# Altium PCB Vref.PcbDoc
Units mm, origin at the board's own origin, x right, y up, seen from the top; angles counter-clockwise.
Board outline 80.34 x 40.24 mm, 4 copper layers (Top Layer, Int2 (Sign), Int3 (Sign), Bottom Layer), stack 1.481 mm thick; 26 components, 19 nets, 106 pads, 8 vias.
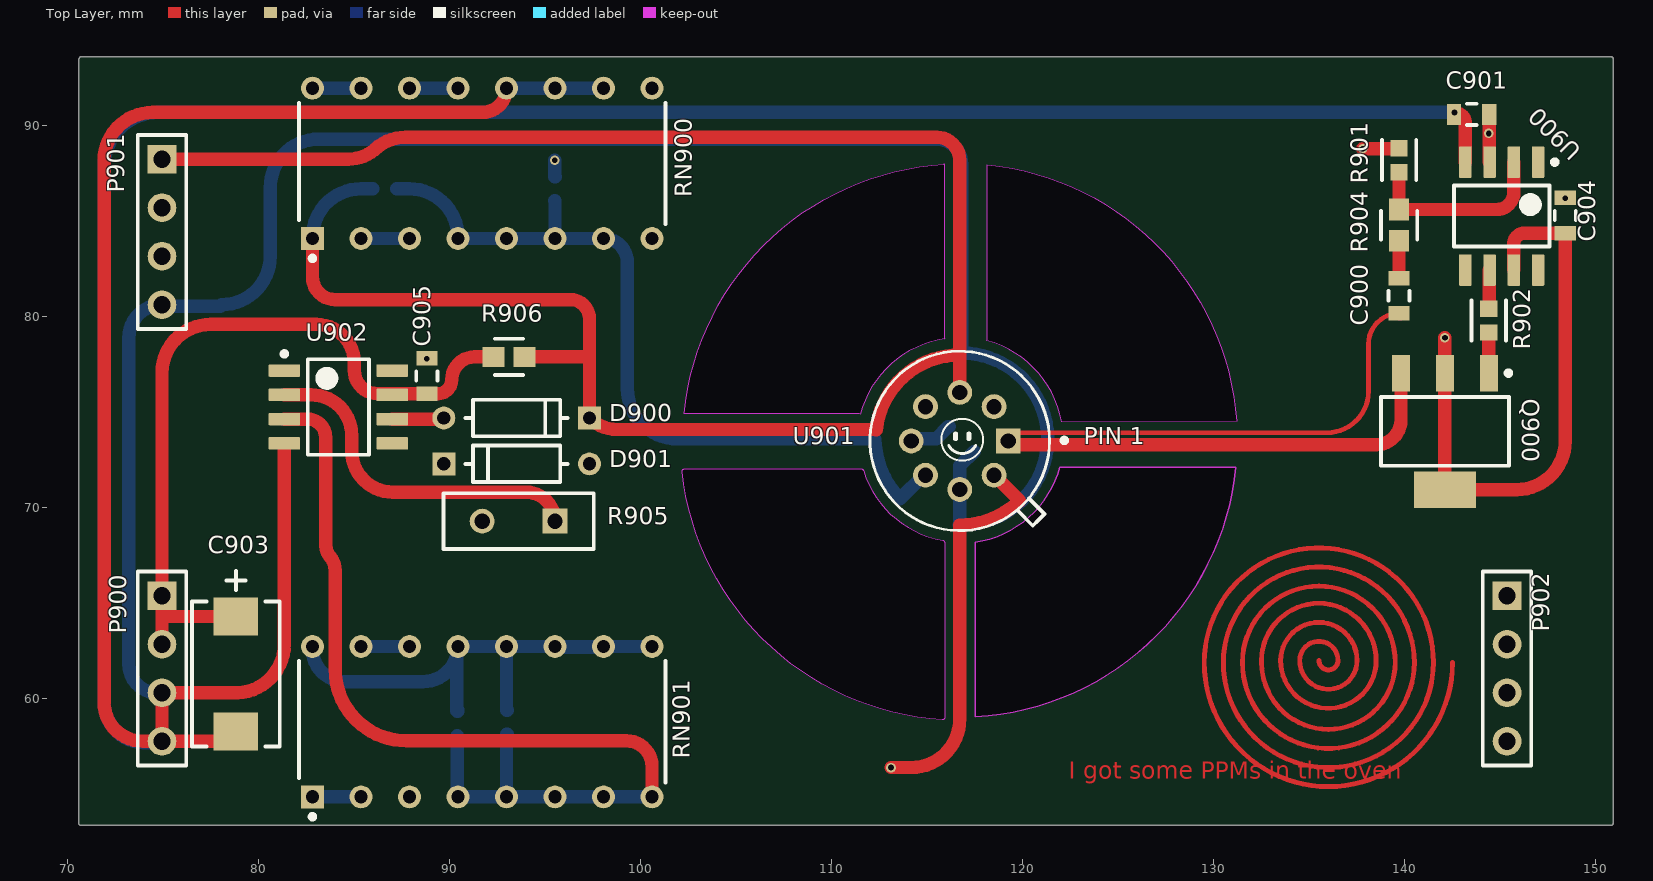
[diagram p0: Top Layer view]
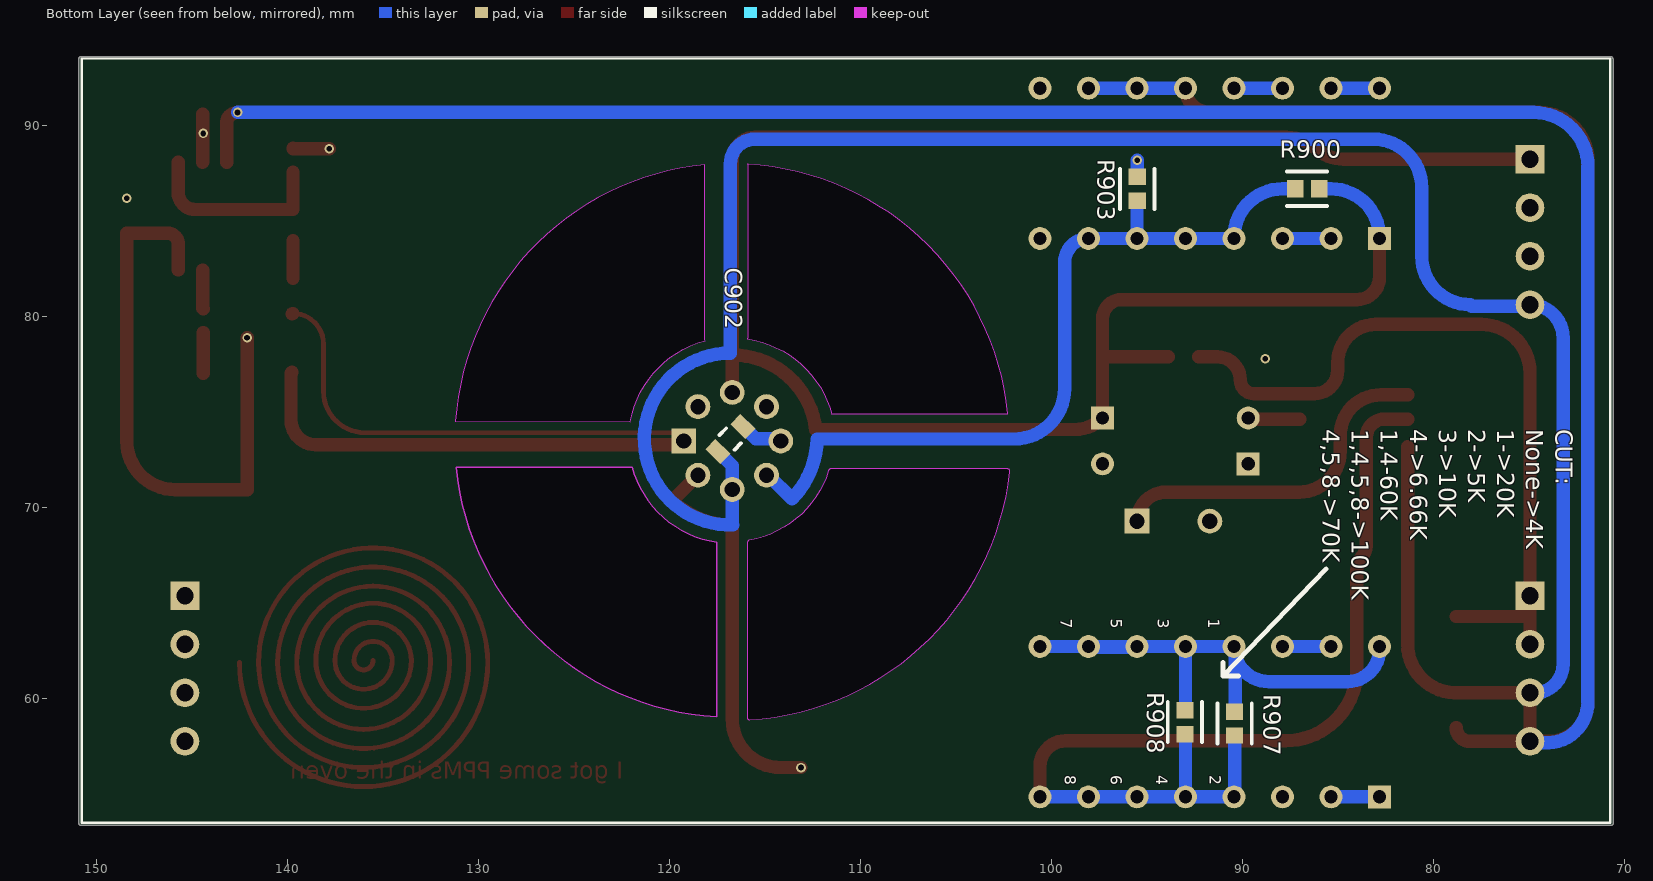
[diagram p1: Bottom Layer view, seen from below]
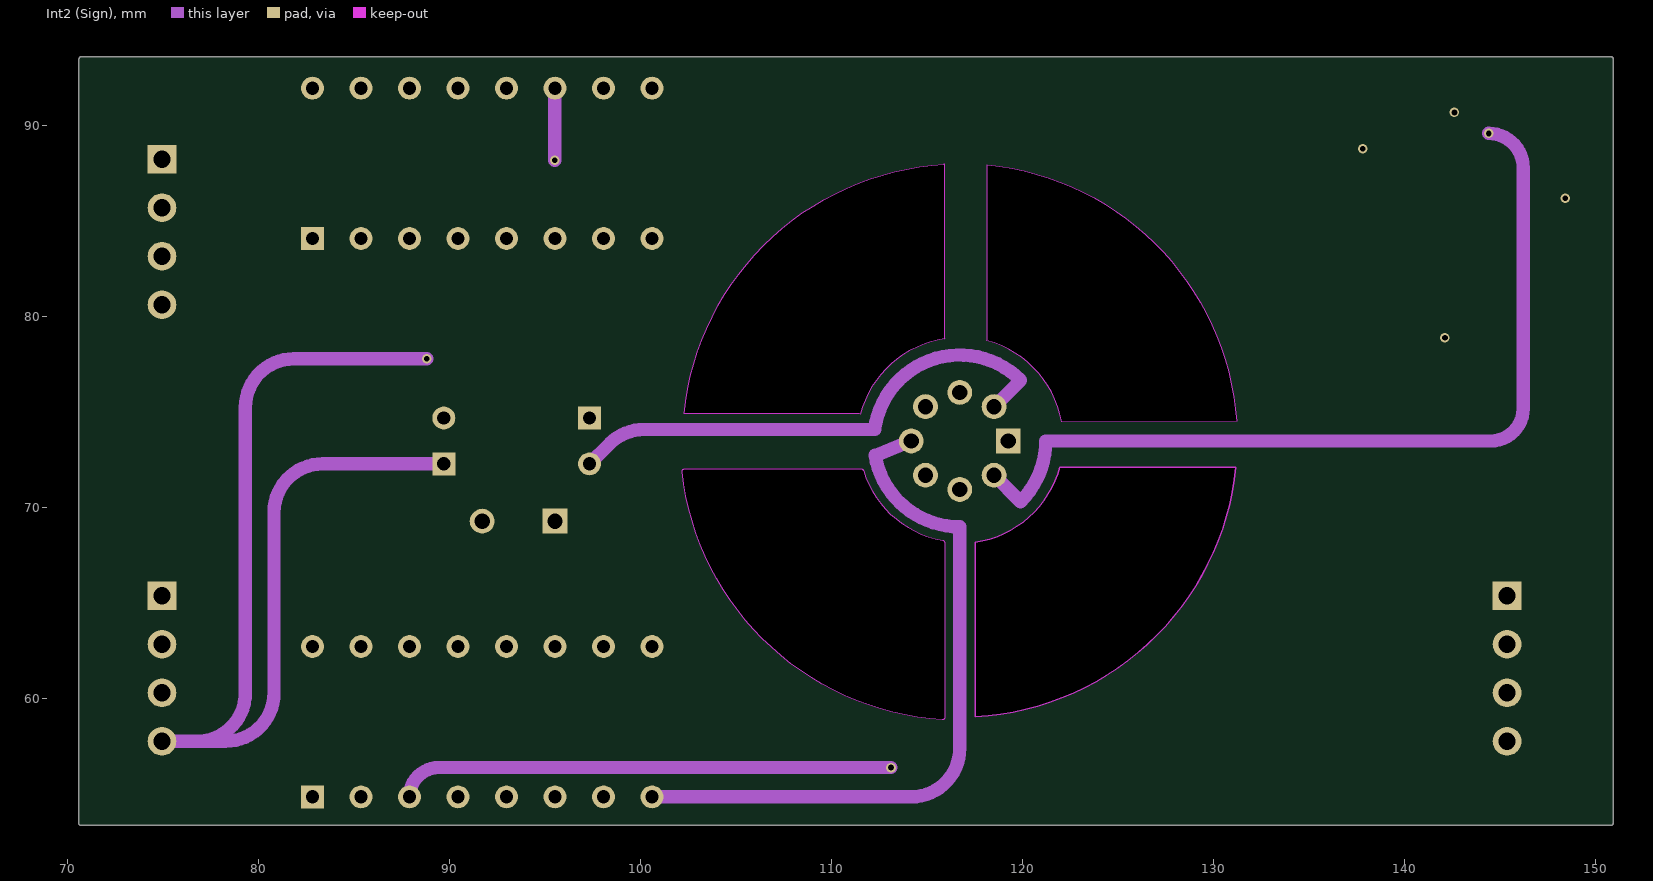
[diagram p2: Int2 (Sign)]
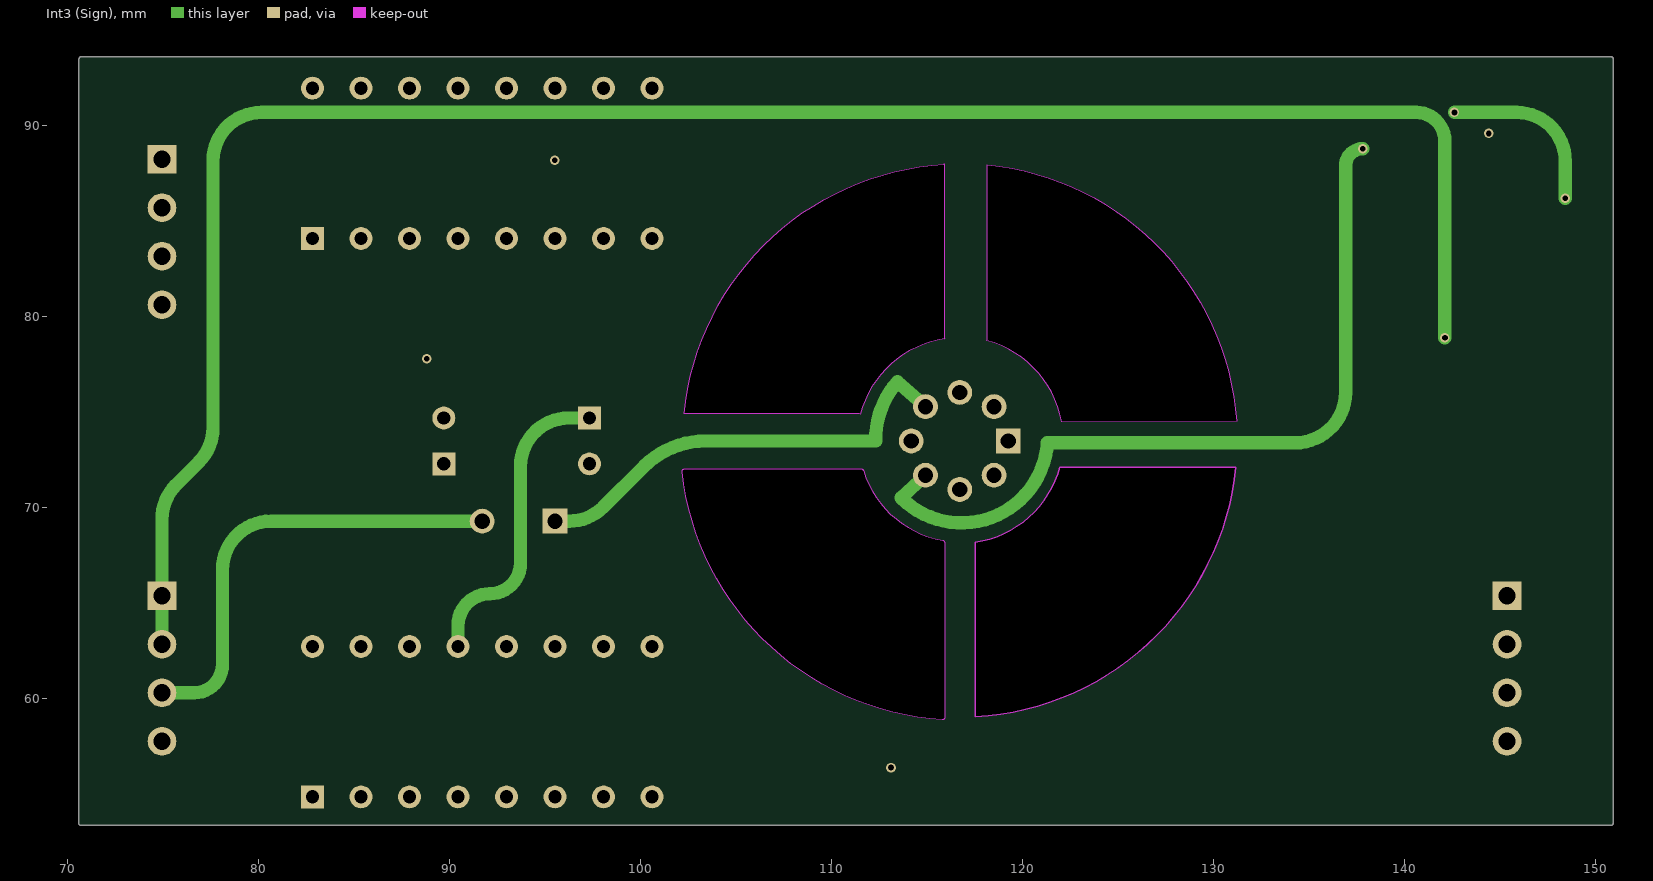
[diagram p3: Int3 (Sign)]
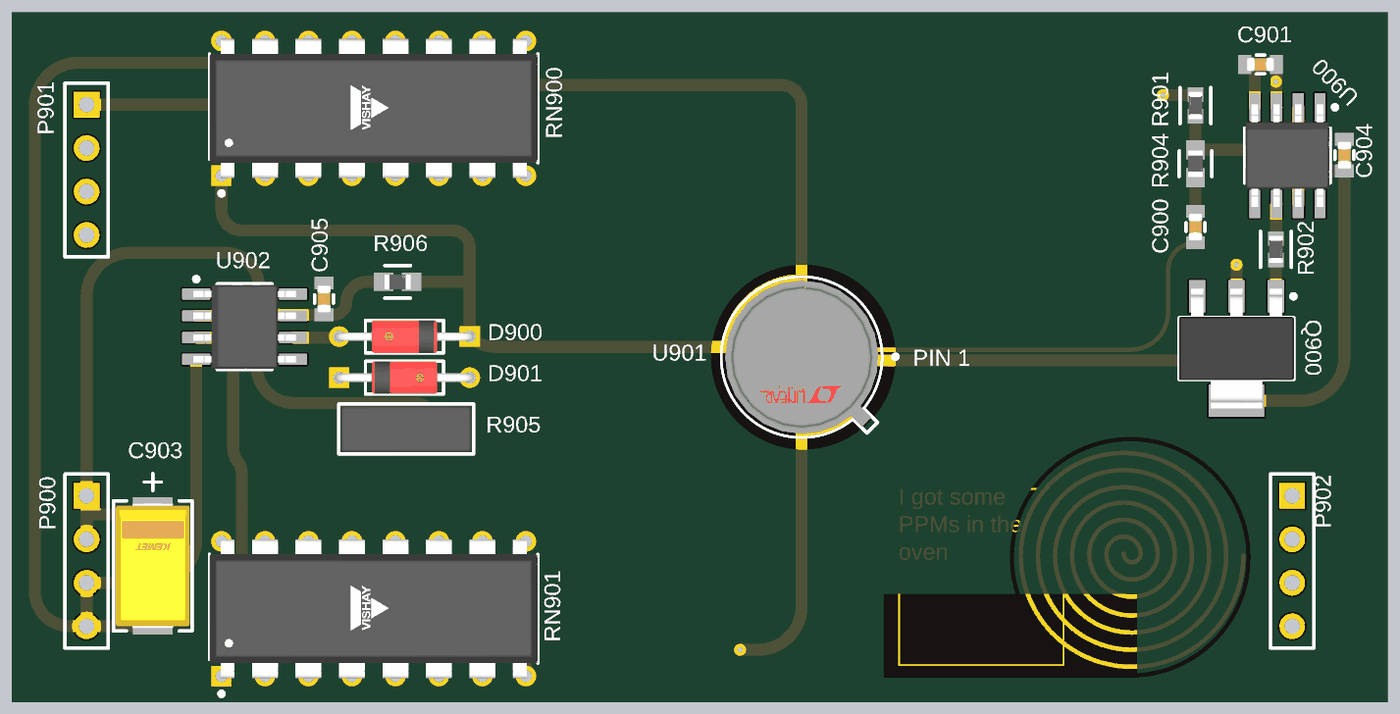
[diagram p4: 3D render of the assembled board from above, using the file's embedded part models]
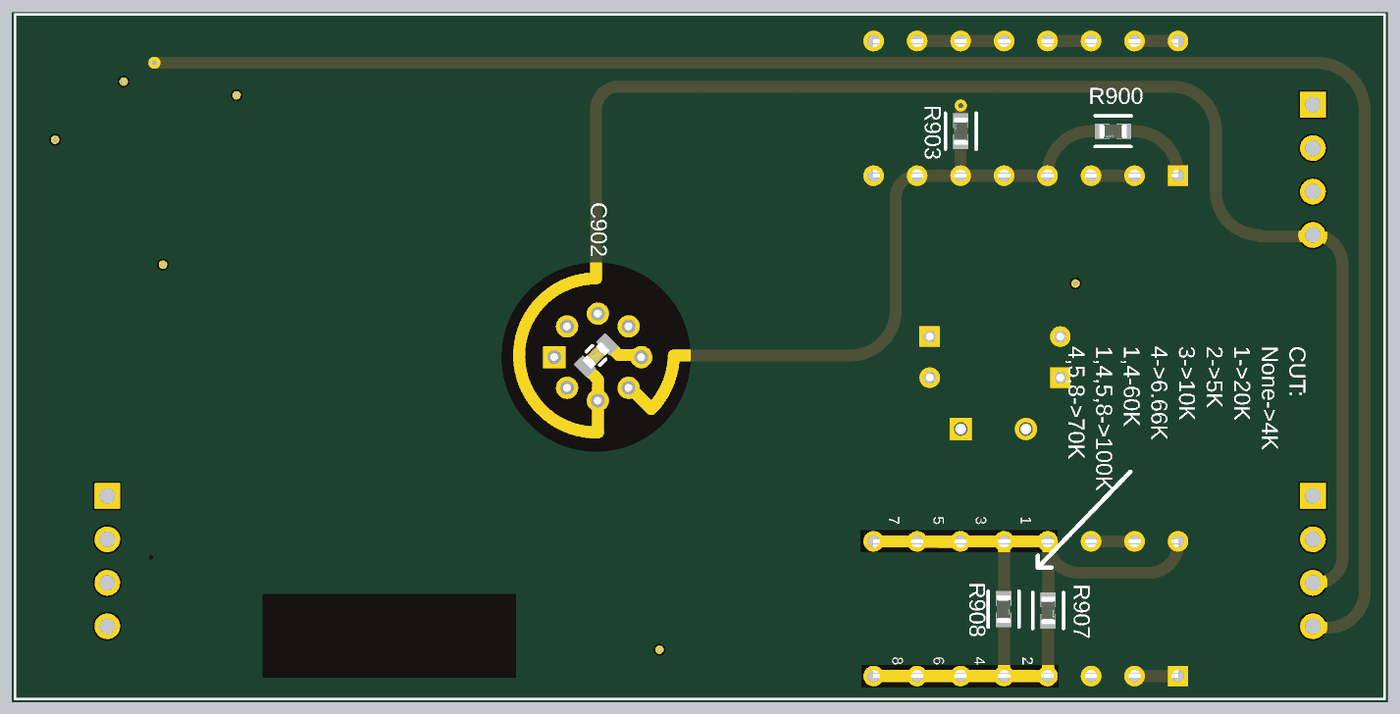
[diagram p5: 3D render of the assembled board from below, using the file's embedded part models]

## Layer stack, top to bottom
Top Solder: solder mask 0.0254, SM-001, Dk 4
Top Layer: signal copper 0.035
Dielectric 1: prepreg 0.0711, PP-006, Dk 4.1
Dielectric 2: prepreg 0.0711, PP-006, Dk 4.1
Dielectric 3: core 0.4572, Core-035, Dk 4.7
Int2 (Sign): signal copper 0.035
Dielectric 4: prepreg 0.0711, PP-006, Dk 4.1
Dielectric 5: prepreg 0.0711, PP-006, Dk 4.1
Int3 (Sign): signal copper 0.035
Dielectric 6: core 0.4572, Core-035, Dk 4.7
Dielectric 7: prepreg 0.0711, PP-006, Dk 4.1
Dielectric 8: prepreg 0.0711, PP-006, Dk 4.1
Bottom Layer: signal copper 0.035
Bottom Solder: solder mask 0.0254, SM-001, Dk 4

## Board outline
70.7,53.373 cw(c70.7,53.5) 70.584,53.553 70.584,93.489 cw(c70.711,93.489) 70.711,93.616 150.788,93.616 cw(c150.788,93.489) 150.915,93.489 150.915,53.5 cw(c150.788,53.5) 150.788,53.373
cut-out: 102.161,71.897 cw(c102.295,71.905) 102.287,72.039 111.539,72.039 cw(c111.539,71.912) 111.661,71.949 ccw(c116.7,73.5) 115.8,68.305 cw(c115.779,68.179) 115.906,68.179 115.906,59.107 115.923,59.028 cw(c115.796,59.028) 115.788,58.901 cw(c116.7,73.5)
cut-out: 122.033,74.517 ccw(c116.723,73.535) 118.125,78.749 118.137,78.796 118.137,87.965 cw(c116.723,73.535) 131.19,74.521
cut-out: 117.522,59.057 117.523,68.158 117.518,68.193 ccw(c116.723,73.535) 121.938,72.133 131.155,72.133 cw(c116.723,73.535)
cut-out: 117.522,59.057 ccw(c116.723,73.535) 131.154,72.12 121.985,72.12 121.938,72.133 cw(c116.723,73.535) 117.518,68.193 117.523,68.158
cut-out: 102.269,74.914 cw(c116.7,73.5) 115.901,87.978 115.9,88 115.9,78.877 115.905,78.841 ccw(c116.7,73.5) 111.485,74.902 111.438,74.914

## Design rules (kind name [scope] priority, off if disabled: settings)
Clearance [All] p1: gap=0.1 ignorepadtopadclearanceinfootprint=FALSE except(0: Arc-Hole Track-Hole SMDPad-Hole THPad-Hole Via-Hole Fill-Hole Poly-Hole Region-Hole Text-Hole; 0.3: Arc-Fill Arc-Poly Arc-Region Track-Fill Track-Poly Track-Region SMDPad-Fill SMDPad-Poly SMDPad-Region THPad-Fill THPad-Poly THPad-Region Via-Fill Via-Poly Via-Region Fill-Fill Fill-Poly Fill-Region Poly-Poly Poly-Region Region-Region)
PolygonConnect [All] p1: connectstyle=Direct reliefconductorwidth=0.254 reliefentries=4 polygonreliefangle="90 Angle" airgapwidth=0.254
RoutingVias [All] p1: holewidth=0.3 width=0.5 viastyle="Through Hole" minholewidth=0.3 minwidth=0.5 maxholewidth=3.2 maxwidth=5
SolderMaskExpansion [All] p1: expansion=0.102 istentingtop=FALSE
Width [All] p1: maxlimit=0.7 minlimit=0.254 preferedwidth=0.35
30 further rules are at their usual default settings.

## Components (designator, comment, footprint, x,y, rotation, side; value= is the part's Value field where it differs from the comment)
C900 "100nF" FP-CGA3E-0_3-0_1-IPC_B 139.7,81.1 r270 top
C901 "100nF" FP-CGA3E-0_3-0_1-IPC_B 143.5,90.6 r0 top
C902 "22nF" FP-CGA3E-0_3-0_1-IPC_B 116.8,73.6 r135 bottom
C903 "T491D226K025AT" FP-T491D226K025AT-MFG 78.8,61.3 r90 top
C904 "100nF" FP-CGA3E-0_3-0_1-IPC_B 148.4,85.3 r90 top
C905 "100nF" FP-CGA3E-0_3-0_1-IPC_B 88.8,76.9 r270 top
D900 "1N4148" FP-017AG-MFG 93.5,74.7 r180 top
D901 "1N4148" FP-017AG-MFG 93.5,72.3 r0 top
P900 "Header 4" HDR1X4 74.933,65.393 r270 top
P901 "Header 4" HDR1X4 74.933,88.253 r270 top
P902 "Header 4" HDR1X4 145.355,65.393 r270 top
Q900 "PZT3904" FAIR-SOT223-4_V 142.1,74 r270 top
R900 "DNP" FP-ERA3A-IPC_C 86.6,86.7 r0 bottom
R901 "10K" FP-ERA3A-IPC_C 139.7,88.2 r90 top
R902 "1K" FP-ERA3A-IPC_C 144.4,79.8 r270 top
R903 "DNP" FP-ERA3A-IPC_C 95.5,86.7 r90 bottom
R904 "1MEG" FP-CRCW0603-e3-IPC_A 139.7,84.8 r270 top
R905 "VPG 120R" FP-S102K-MFG 93.6,69.3 r180 top
R906 "1MEG" FP-CRCW0603-e3-IPC_A 93.1,77.9 r0 top
R907 "DNP" FP-ERA3A-IPC_C 90.4,58.7 r270 bottom
R908 "DNP" FP-ERA3A-IPC_C 93,58.774 r270 bottom
RN900 "NOMCT16032001AT1 8X10K" FP-TDP16-MFG 91.7,88.035 r90 top
RN901 "NOMCT16032002DUF 8X20K" FP-TDP16-MFG 91.7,58.8 r90 top
U900 "LT1006" D0008A_M 145.073,85.273 r270 top
U901 "LTZ1000ACH#PBF" FP-H-8-05-08-1320-MFG 116.7,73.5 r0 top
U902 "OP07" D0008A_M 84.164,75.279 r0 top

## Footprints (in the part's own frame and the unit in brackets; to place one, negate y for a bottom-side part, rotate by r counter-clockwise, add the part's x,y. Pads: shape width x height; smd on the part's side, far side on the other; paste and mask are expansions set on the pad)
D0008A_M [mm] "SOIC, 8-Leads, Body 5x4mm, Pitch 1.27mm, IPC Low Density"
  rrect15% 1.65x0.65 smd: 1(-2.825,1.905) 2(-2.825,0.635) 3(-2.825,-0.635) 4(-2.825,-1.905) 5(2.825,-1.905) 6(2.825,-0.635) 7(2.825,0.635) 8(2.825,1.905)
  silkscreen extent -2.95,-2.5 1.6,2.91, body extent -3,-2.45 3,2.45, height 1.63
FAIR-SOT223-4_V [mm] "SOT223, 4-Leads, Body 6.7x3.7mm, Pitch 2.3mm"
  rect 1.9x0.95 smd: 1(-3.05,2.3) 2(-3.05,0) 3(-3.05,-2.3)
  rect 1.9x3.25 smd: 4(3.05,0)
  silkscreen extent -3.17,-3.35 1.8,3.45, body extent -3.5,-3.35 3.5,3.35, height 1.8
FP-017AG-MFG [mm]
  rect 1.2x1.2 hole 0.7 paste-1000 mask+0: 1(-3.813,0)
  round 1.2 hole 0.7 paste-1000 mask+0: 2(3.813,0)
  silkscreen extent -2.68,-0.95 2.68,0.95, body extent -4.51,-1.05 4.51,1.05, height 0.25
FP-CGA3E-0_3-0_1-IPC_B [mm]
  rect 0.756x1.106 smd paste+0 mask+0: 1(-0.925,0) 2(0.925,0)
  silkscreen extent -0.25,-0.55 0.25,0.55, body extent -1.55,-0.8 1.55,0.8, height 0.25
FP-CRCW0603-e3-IPC_A [mm]
  rect 1.135x1.062 smd paste+0 mask+0: 1(-0.815,0) 2(0.815,0)
  silkscreen extent -0.75,-0.95 0.75,0.95, body extent -1.88,-1.03 1.88,1.03, height 0.25
FP-ERA3A-IPC_C [mm]
  rect 0.855x0.906 smd paste+0 mask+0: 1(-0.626,0) 2(0.626,0)
  silkscreen extent -1.05,-0.9 1.05,0.9, body extent -0.8,-0.4 0.8,0.4, height 0.55
FP-H-8-05-08-1320-MFG [mm]
  rect 1.3x1.3 hole 0.8 paste-1000 mask+0: 1(2.54,0)
  round 1.3 hole 0.8 paste-1000 mask+0: 2(1.796,1.796) 3(0,2.54) 4(-1.796,1.796) 5(-2.54,0) 6(-1.796,-1.796) 7(0,-2.54) 8(1.796,-1.796)
  silkscreen extent -4.7,-4.7 5.6,4.7, body extent -4.8,-4.8 4.8,4.8, height 0.25
FP-S102K-MFG [mm]
  rect 1.3x1.3 hole 0.8 paste-1000 mask+0: 1(-1.905,0)
  round 1.3 hole 0.8 paste-1000 mask+0: 2(1.905,0)
  silkscreen extent -3.94,-1.46 3.94,1.46, body extent -4.04,-1.56 4.04,1.56, height 0.25
FP-T491D226K025AT-MFG [mm]
  rect 1.99x2.33 smd paste+0 mask+0: 1(-3.01,0) 2(3.01,0)
  silkscreen extent -3.8,-2.3 5.4,2.3, body extent -4.1,-2.4 4.1,2.4, height 0.25
FP-TDP16-MFG [mm]
  rect 1.2x1.2 hole 0.7 paste-1000 mask+0: 1(-3.935,8.89)
  round 1.2 hole 0.7 paste-1000 mask+0: 2(-3.935,6.35) 3(-3.935,3.81) 4(-3.935,1.27) 5(-3.935,-1.27) 6(-3.935,-3.81) 7(-3.935,-6.35) 8(-3.935,-8.89) 9(3.935,-8.89) 10(3.935,-6.35) 11(3.935,-3.81) 12(3.935,-1.27) 13(3.935,1.27) 14(3.935,3.81) 15(3.935,6.35) 16(3.935,8.89)
  silkscreen extent -5.1,-9.59 3.17,9.59, body extent -4.63,-9.69 4.63,9.69, height 0.25
HDR1X4 [mm] "Connector; Header; 4 Position"
  rect 1.5x1.5 hole 0.9: 1(0,0)
  round 1.5 hole 0.9: 2(2.54,0) 3(5.08,0) 4(7.62,0)
  silkscreen extent -1.27,-1.27 8.89,1.27

## Part data
C900 C901 C904 C905: library part CMP-2000-07546-2, "Cap Ceramic 100nF 50V X7R 10% Pad SMD 0603 +125°C Automotive T/R", Case Code (Imperial)=0603, Case Code (Metric)=1608, Dielectric=X7R, Max Operating Temperature=125°C, Min Operating Temperature=-55°C, Package Quantity=1, Ratings=AEC-Q200, Tolerance=10%, Voltage=50V, Capacitance=100nF, Case/Package=0603, Composition=Ceramic, Depth=0.8mm, Height=0.8mm, Lead Free="Lead Free", Length=1.6mm, Mount="Surface Mount", Packaging="Tape and Reel", Radiation Hardening=No, REACH SVHC="No SVHC", Termination=SMD/SMT, Thickness=0.035inch, Voltage Rating=50V, Voltage Rating (DC)=50V, Weight=7.1E-05oz, Width=0.8mm
C902: library part CMP-2000-07546-2, "Cap Ceramic 100nF 50V X7R 10% Pad SMD 0603 +125°C Automotive T/R", Capacitance=100nF, Case Code (Imperial)=0603, Case Code (Metric)=1608, Dielectric=X7R, Max Operating Temperature=125°C, Min Operating Temperature=-55°C, Package Quantity=1, Ratings=AEC-Q200, Tolerance=10%, Voltage=50V, Case/Package=0603, Composition=Ceramic, Depth=0.8mm, Height=0.8mm, Lead Free="Lead Free", Length=1.6mm, Mount="Surface Mount", Packaging="Tape and Reel", Radiation Hardening=No, REACH SVHC="No SVHC", Termination=SMD/SMT, Thickness=0.035inch, Voltage Rating=50V, Voltage Rating (DC)=50V, Weight=7.1E-05oz, Width=0.8mm
C903: library part CMP-03017-000021-1, "CAP TANT 22UF 10% 25V 2917", Capacitance=22uF, Case Code (Imperial)=2917, Case Code (Metric)=7343, Dielectric Material=Tantalum, ESR (Equivalent Series Resistance)=800mR, Leakage Current=5.5uA, Max Operating Temperature=125°C, Min Operating Temperature=-55°C, Package Quantity=1, Ripple Current=433mA, Tolerance=10%, Voltage=25V, Case/Package=2917, Depth=4.3mm, Dissipation Factor=6%, Features="General Purpose", Height=2.8mm, Height - Seated (Max)=0.122inch, Lead Free="Lead Free", Length=7.3mm, Life (Hours)=2000Hour, Mount="Surface Mount", Number of Pins=2, Packaging="Tape and Reel", Polarity=Polar, Radiation Hardening=No, REACH SVHC="No SVHC", Termination=SMD/SMT, Voltage Rating=25V, Voltage Rating (DC)=25V, Width=4.3mm
D900 D901: library part CMP-07163-000046-1, "DIODE GEN PURP 100V 200MA DO35", Average Rectified Current=200mA, Capacitance=4pF, Case/Package=DO-35, Current=4A, Forward Current=300mA, Forward Voltage=1V, Max Forward Surge Current (Ifsm)=1A, Max Operating Temperature=175°C, Max Power Dissipation=500mW, Max Repetitive Reverse Voltage (Vrrm)=100V, Max Reverse Current=5uA, Min Operating Temperature=-65°C, Package Quantity=2000, Contact Plating=Tin, Current Rating=200mA, Diameter=1.91mm, Element Configuration=Single, Height=4.56mm, Lead Free="Lead Free", Length=4.56mm, Max Reverse Voltage (DC)=100V, Max Surge Current=4A, Mount="Through Hole", Number of Pins=2, Output Current=200mA, Outside Diameter=1.85mm, Packaging=Bulk, Peak Non-Repetitive Surge Current=4A, Polarity=Standard, Power Dissipation=500mW, Radiation Hardening=No, REACH SVHC="No SVHC", Recovery Time=4ns, Reverse Recovery Time=4ns, Reverse Voltage=100V, Series=-, Voltage=100V, Voltage Rating (DC)=100V, Weight=0.01lb, Width=1.91mm
P900 P901 P902: "Header, 4-Pin", LatestRevisionDate=17-Jul-2002, LatestRevisionNote="Re-released for DXP Platform.", Publisher="Altium Limited"
Q900: library part CMP-2000-06916-1, "NPN General-Purpose Amplifier, 40 V, 200 mA, -55 to 150 degC, 4-Pin SOT223, RoHS, Tape and Reel", Manufacturer=FairchildSemiconductor, Maximum Collector Base Voltage=60V, Maximum Collector Emitter Saturation Voltage=0.2@1mA@10mA, Maximum Collector Emitter Voltage=40V, Maximum DC Collector Current=0.2A, Maximum Operating Frequency=300(Min)MHz, Maximum Power Dissipation=1000mW, Minimum DC Current Gain=40@0.1mA@1V, Operating Temperature=-55to150°C, Package=4SOT-223, Package Description="4-Pin Small Outline Transistor, Body 6.45 x 3.5 mm, Pitch 2.3 mm", Package Reference=SOT223-4, Package Version="Rev. 3, 07/2016", Category=GPBJT, Datasheet URL=https://www.fairchildsemi.com/datasheets/MM/MMBT3904.pdf, Datasheet Version="Rev. 1.1.0, 10/2014", Manufacturer URL=https://www.fairchildsemi.com/, Mounting=SurfaceMount, Mounting Technology=SurfaceMount, Package URL=https://www.fairchildsemi.com.cn/package-drawings/MA/MA04A.pdf, Packaging=Tape&Reel, Pin Count=4, Rad Hard=No, Type=NPN
R900 R901 R902 R903 R907 R908: library part CMP-2000-00873-2, "RES SMD 1K OHM 0.1% 1/10W 0603", Case Code (Imperial)=0603, Case Code (Metric)=1608, Max Operating Temperature=155°C, Max Power Dissipation=100mW, Min Operating Temperature=-55°C, Package Quantity=5000, Resistance=1kR, Resistance Tolerance=0.1%, Resistor Type="Thin Film", Temperature Coefficient=25ppm/°C, Voltage Rating=75V, Case/Package=0603, Construction=Rectangular, Contact Plating=Tin, Depth=0.8mm, Height=0.45mm, Length=1.6mm, Military Standard=Not, Mount="Surface Mount", Number of Pins=2, Number of Terminations=2, Packaging="Tape and Reel", Power Rating=100mW, Radiation Hardening=No, REACH SVHC="No SVHC", RoHS Compliant=Yes, Series=ERA-3A, Size Code=0603, Technology="METAL FILM", Termination=SMD/SMT, Tolerance=0.1%, Width=0.8mm
R904 R906: library part CMP-2000-03013-2, "RES Thick Film, 1MΩ, 1%, 0.1W, 100ppm/°C, 0603", Case Code (Imperial)=0603, Case Code (Metric)=1608, Max Operating Temperature=155°C, Max Power Dissipation=100mW, Min Operating Temperature=-55°C, Package Quantity=10, Resistance=1MR, Temperature Coefficient=100ppm/°C, Tolerance=1%, Voltage Rating=75V, Case/Package=0603, Composition="Thick Film", Contact Plating=Tin, Depth=0.85mm, Features="Automotive AEC-Q200", Height=0.45mm, Lead Free="Lead Free", Length=1.55mm, Military Standard=Not, Mount="Surface Mount", Number of Pins=2, Number of Terminations=2, Packaging="Tape and Reel", Power Rating=100mW, Radiation Hardening=No, Termination=SMD/SMT, Voltage Rating (DC)=75V, Weight=7.1E-05oz, Width=0.85mm
R905: library part CMP-10850-000015-1, "RES 20K OHM 0.6W 0.01% RADIAL", Case/Package=Radial, Power Rating=600mW, Resistance=20kR, Resistance Tolerance=0.01%, Resistor Type="Metal Foil", Temperature Coefficient=1ppm/°C, Voltage Rating=300V, Mount="Through Hole", RoHS Compliant=Yes, Tolerance=0.01%
RN900 RN901: library part CMP-02406-000013-1, "Res Thin Film NET 100K Ohm 0.5% 4/5W ±25ppm/°C ISOL Molded 16-Pin DIP Pin Thru-Hole Tube", Case/Package=DIP, Max Operating Temperature=125°C, Min Operating Temperature=-55°C, Number of Resistors=8, Resistance=100kR, Temperature Coefficient=25ppm/°C, Mount="Through Hole", Number of Pins=16, Number of Terminals/Pins=16, Packaging=Bulk, Radiation Hardening=No, RoHS Compliant=No, Technology="THIN FILM"
U900 U902: library part CMP-0271-00131-3, "11 MHz, Single Supply, Low Noise, Precision, Rail-to-Rail Output, JFET Amplifier, 4.5 to 36 V, -40 to 125 degC, 8-pin SOIC (D8), Green (RoHS & no Sb/Br)", Manufacturer="Texas Instruments", PartNumber=OPA140AID, Rating=Catalog, Total Supply Voltage(Max)(+5V is 5, +/-5V is 10)=36, Total Supply Voltage(Min)(+5V is 5, +/-5V is 10)=4.5, CMRR(Min)(dB)=126, Code_JEDEC=MS-012, ComponentLink1Description="Manufacturer URL", ComponentLink1URL=http://www.ti.com/, ComponentLink2Description=Datasheet, ComponentLink2URL=http://www.ti.com/lit/ds/symlink/opa140.pdf, ComponentLink3Description="Package Specification", ComponentLink3URL=http://www.ti.com/litv/pdf/msoi002j, DatasheetVersion=SBOS498A, Eco-Plan="Green (RoHS & no Sb/Br)", GBW(Typ)(MHz)=11, IIB(Max)(pA)=10, Iq per channel(Max)(mA)=2, Mounting Technology="Surface Mount", Number of Channels=1, Offset Drift(Typ)(uV/C)=0.35, PackageDescription="8-Pin Plastic Small Outline, Body 4.9 x 3.9 mm, Pitch 1.27 mm", PackageReference=D0008A, PackageVersion="4040047-3/M, 06/2011", Packing=TUBE, Slew Rate(Typ)(V/us)=20, Sub Family="High Supply Voltage Amplifier (>=30V), Low Input Bias Current Amp (<=10pA), Low Noise Amp (<=10nV/rtHz), Low Offset Voltage Amplifier (<=500uV), Precision Amplifier", Vio (25C)(Max)(mV)=0.12
U901: library part CMP-09137-000002-1, "IC VREF SHUNT 7.2V TO5", Ambient Temperature Range High=+125°C, Ambient Temperature Range Low=-55°C, Manufacturer="Analog Devices", Max Junction Temp=+150°C, Package=H-8-05-08-1320, Temperature="-55°C to +125°C", Automotive=No, Category=IC, ComponentLink2Description=Datasheet, ComponentLink2URL=https://www.analog.com/media/en/technical-documentation/data-sheets/LTZ1000.pdf, Device Class L1="Integrated Circuits (ICs)", Device Class L2="Power Management ICs", Device Class L3="Voltage References", Digikey Description="IC VREF SHUNT 7.2V TO5", Height=5.969mm, Lead Free=Yes, Manufacturer Part Number=LTZ1000ACH#PBF, Number of Outputs=1, Octopart=https://octopart.com/ltz1000ach%23pbf-analog+devices-88320833, Output Type=Fixed, Reference Type="Buried Zener", RoHS=TRUE, Standoff Height=0.254mm, Temperature Range High=+125°C, Temperature Range Low=-55°C

## Via types
v1: diameter 0.5, hole 0.3, Top Layer to Bottom Layer, 8 vias

## Nets (pads, with @x,y where several pads share a name; then routed paths per layer and width w, separated by ;. In a path a pad name is that pad's centre, name@x,y a point inside that pad or via, vN(x,y) a via of type N, cw(c..) or ccw(c..) an arc to the next point about the centre after c; other vN are vias at no path point)
BQ1: R905.1 U901.4 U902.2 | length 41.8
  Top Layer w0.7: U902.2 82.733,75.914 cw(c82.733,73.779) 84.867,73.779 84.867,72.969 ccw(c87.017,72.969) 87.017,70.819 93.986,70.819 cw(c93.986,69.3) R905.1
  Int3 (Sign) w0.7: R905.1 96.248,69.3 ccw(c96.248,71.84) 98.044,70.044 100.156,72.156 cw(c103.401,68.911) 103.401,73.5 112.301,73.5 ; 112.301,73.511 cw(c116.8,73.6) 113.442,76.595 U901.4
BQ2: R900.2 R901.2 R903.1 RN900.4 RN900.5 RN900.6 RN900.7 U901.6 | length 87
  Top Layer w0.7: v1(137.8,88.8) 139.674,88.8 ccw(c139.674,88.826) R901.2
  Int3 (Sign) w0.7: U901.6 113.622,70.522 ccw(c116.8,73.707) 121.289,73.394 121.289,73.4 134.26,73.4 ccw(c134.26,76.04) 136.9,76.04 136.9,87.9 cw(c137.8,87.9) v1(137.8,88.8)
  Bottom Layer w0.7: R900.2 87.89,86.7 cw(c87.89,84.16) 90.43,84.16 RN900.4 RN900.5 RN900.6 ; R903.1 95.51,86.074 RN900.6 ; U901.6 114.809,71.704 113.571,70.466 cw(c116.906,73.703) 112.259,73.6 101.94,73.6 cw(c101.94,76.24) 99.3,76.24 99.3,82.85 ccw(c98.05,82.85) RN900.7 RN900.6
CQ1: C902.2 R907.2 R908.2 RN901.4 RN901.5 RN901.6 RN901.7 RN901.8 U901.5 U902.3 | length 92.7
  Top Layer w0.7: U902.3 82.556,74.644 cw(c82.556,73.7) 83.5,73.7 83.5,68.166 ccw(c84.866,68.166) 83.657,67.53 cw(c82.829,66.702) 83.878,67.223 cw(c82.829,66.702) 84,66.702 84,61.54 ccw(c87.74,61.54) 87.74,57.8 99.25,57.8 cw(c99.25,56.46) 100.59,56.46 RN901.8
  Int2 (Sign) w0.254: U901.5 U901.5@114.534,73.5
  Int2 (Sign) w0.7: RN901.8 114.16,54.865 ccw(c114.16,57.405) 116.7,57.405 116.7,69 cw(c116.7,73.5) 112.261,72.76 ; 112.459,72.793 U901.5
  Bottom Layer w0.7: R907.2 90.4,54.895 ccw(c90.43,54.895) RN901.4 RN901.7 RN901.8 ; RN901.5 92.97,58.119 cw(c93,58.119) R908.2 ; U901.5 114.275,73.615 115.467,73.615 116.106,74.254 C902.2
CQ2: C901.2 RN901.3 U900.3 U901.8 | length 96.4
  Top Layer w0.7: v1(113.1,56.4) 114.16,56.4 ccw(c114.16,58.94) 116.7,58.94 116.7,69.1 ccw(c116.7,73.6) 119.829,70.366 ; U901.8 119.76,70.438 ; C901.2 144.431,90.594 144.431,88.104 U900.3
  Int2 (Sign) w0.35: U901.8 U901.8@118.965,71.704
  Int2 (Sign) w0.7: RN901.3 cw(c89.425,54.865) 89.425,56.4 v1(113.1,56.4) ; U901.8 119.882,70.318 ccw(c116.7,73.5) 121.2,73.5 144.5,73.5 ccw(c144.5,75.2) 146.2,75.2 146.2,87.8 ccw(c144.4,87.8) v1(144.4,89.6)
GND: C901.1 C902.1 C903.1 C904.2 C905.1 D901.1 P900.3 P900.4 P901.4 R903.2 R905.2 RN900.10 RN900.11 RN900.12 U900.4 U901.7 U902.4 | length 388.1
  Top Layer w0.7: C903.1@78.8,58.5 cw(c78.073,58.5) 78.073,57.773 P900.4 ; U902.4@81.339,73.2 81.339,62.853 cw(c78.799,62.853) 78.898,60.315 cw(c78.799,62.853) 78.799,60.313 P900.3 P900.4 ; RN900.12 cw(c91.7,91.97) 91.7,90.7 74.44,90.7 ccw(c74.44,88.16) 71.9,88.16 71.9,59.813 ccw(c73.94,59.813) 73.94,57.773 P900.4 ; v1(142.6,90.7) cw(c142.6,90.132) 143.168,90.132 U900.4
  Int2 (Sign) w0.7: P900.4 76.76,57.773 ; v1(88.8,77.8) 81.84,77.8 ccw(c81.84,75.26) 79.3,75.26 79.3,60.313 cw(c76.76,60.313) 76.76,57.773 ; D901.1 83.34,72.3 ccw(c83.34,69.76) 80.8,69.76 80.8,60.313 cw(c78.26,60.313) 78.26,57.773 76.76,57.773 ; v1(95.5,88.2) 95.5,91.97 RN900.11
  Int3 (Sign) w0.7: P900.3 76.613,60.313 ccw(c76.613,61.8) 78.1,61.8 78.1,66.76 cw(c80.64,66.76) 80.64,69.3 R905.2 ; v1(142.6,90.7) 145.86,90.7 cw(c145.86,88.16) 148.4,88.16 v1(148.4,86.2)
  Bottom Layer w0.7: P900.4 74.492,57.731 74.461,57.728 cw(c74.051,59.84) 71.9,59.84 71.9,59.841 71.9,87.86 cw(c74.74,87.86) 74.74,90.7 v1(142.6,90.7) ; P900.3 74.687,60.313 cw(c74.687,61.8) 73.2,61.8 73.2,78.9 cw(c74.933,78.9) P901.4 ccw(c75.015,80.633) 75.015,80.551 77.994,80.551 ; 78.06,80.633 ccw(c78.06,83.173) 80.6,83.173 80.6,86.76 cw(c83.14,86.76) 83.14,89.3 115.5,89.3 cw(c115.5,88) 116.8,88 116.8,78.1 cw(c116.8,73.6) 116.682,69.102 116.7,69.12 U901.7 116.7,72.192 C902.1 ; RN900.12 RN900.11 RN900.10 ; v1(95.5,88.2) R903.2 R903.2@95.526,87.326
HTR: C900.2 Q900.3 U901.1 | length 49.2
  Top Layer w0.254: U901.1 119.673,73.933 135.933,73.933 ccw(c135.933,76.1) 138.1,76.1 138.1,78.575 cw(c139.7,78.575) C900.2
  Top Layer w0.7: U901.1 119.44,73.3 138.5,73.3 ccw(c138.5,74.6) 139.8,74.6 Q900.3 Q900.3@139.75,77.1 ; C900.2 139.722,80.175 C900.2@139.75,80.147
NetC900_1: C900.1 R904.2 | length 2
  Top Layer w0.7: C900.1 R904.2
NetD900_2: D900.2 U902.6 | length 2.7
  Top Layer w0.7: U902.6 89.551,74.644 ccw(c89.551,74.836) D900.2
NetD901_2: D901.2 U901.2 | length 27.5
  Int2 (Sign) w0.7: D901.2 98.369,73.356 cw(c100.165,71.56) 100.165,74.1 112.241,74.1 112.241,74.108 cw(c116.7,73.5) 119.882,76.682 ; U901.2 119.831,76.631
NetQ900_1: Q900.1 R902.2 | length 2.1
  Top Layer w0.7: Q900.1 R902.2
NetR901_1: R901.1 R904.1 U900.2 | length 10.1
  Top Layer w0.7: R901.1 R904.1 144.815,85.615 ccw(c144.815,86.508) 145.708,86.508 U900.2
NetR902_1: R902.1 U900.6 | length 2
  Top Layer w0.7: R902.1 144.419,80.445 144.419,82.429 U900.6
NetRN900_2: RN900.2 RN900.3 | length 2.5
  Bottom Layer w0.7: RN900.2 RN900.3
NetRN900_13: RN900.13 RN900.14 | length 2.5
  Bottom Layer w0.7: RN900.14 RN900.13
NetRN900_15: RN900.15 RN900.16 | length 2.5
  Bottom Layer w0.7: RN900.16 RN900.15
NetRN901_1: RN901.1 RN901.2 | length 2.5
  Bottom Layer w0.7: RN901.1 RN901.2
NetRN901_14: RN901.14 RN901.15 | length 2.5
  Bottom Layer w0.7: RN901.15 RN901.14
VCC: C903.2 C904.1 C905.2 P900.1 P900.2 Q900.2 Q900.4 R906.1 U900.7 U902.7 | length 174.4
  Top Layer w0.7: P900.2 74.933,64.31 ; C903.2 74.933,64.31 ; R906.1 91.3,77.9 ccw(c91.3,76.7) 90.1,76.7 cw(c89.375,76.7) 89.375,75.975 C905.2 86.225,75.975 cw(c86.225,77.2) 85,77.2 85,77.6 ccw(c83,77.6) 83,79.6 77.473,79.6 ccw(c77.473,77.06) 74.933,77.06 P900.1 74.933,64.31 ; Q900.4 145.86,70.95 ccw(c145.86,73.49) 148.4,73.49 C904.1 146.275,84.375 ccw(c146.275,83.8) 145.7,83.8 145.7,82.448 U900.7 ; Q900.4@142.1,71 Q900.2 v1(142.1,78.9)
  Int3 (Sign) w0.7: P900.2 P900.1 74.933,69.414 cw(c77.473,69.414) 75.677,71.21 76.856,72.389 ccw(c75.06,74.185) 77.6,74.185 77.6,88.16 cw(c80.14,88.16) 80.14,90.7 140.6,90.7 cw(c140.6,89.2) 142.1,89.2 v1(142.1,78.9)
VRF_HI: D900.1 P901.1 R900.1 R906.2 R907.1 R908.1 RN900.1 RN901.9 RN901.10 RN901.11 RN901.12 RN901.13 RN901.16 U901.3 | length 152.9
  Top Layer w0.7: P901.1 84.684,88.253 ccw(c84.684,90.44) 85.496,88.409 ccw(c84.684,90.44) 86.23,88.893 ; RN900.1 82.81,82.09 ccw(c84,82.09) 84,80.9 96.313,80.9 cw(c96.313,79.9) 97.313,79.9 97.313,77.9 ; 86.272,88.934 cw(c87.69,87.01) 87.69,89.4 115.5,89.4 cw(c115.5,88.2) 116.7,88.2 116.7,78.001 ; RN901.12 ccw(c92.825,62.88) RN901.12@93.03,62.88 ; R906.2@93.879,77.9 97.313,77.9 ; 112.326,74.086 cw(c116.7,73.6) 116.7,78.001 ; 112.326,74.1 98.762,74.1 cw(c98.762,76.149) D900.1 97.313,77.9 ; U901.3 116.7,78.001
  Int3 (Sign) w0.7: RN901.13 90.43,63.83 cw(c92.1,63.83) 92.1,65.5 ccw(c92.1,67.1) 93.7,67.1 93.7,72.16 cw(c96.24,72.16) 96.24,74.7 D900.1
  Bottom Layer w0.7: RN900.1@82.8,84.1 RN900.1 82.81,84.16 cw(c85.35,84.16) 85.35,86.7 R900.1 ; RN901.16 82.81,62.59 ccw(c84.5,62.59) 84.5,60.9 88.595,60.9 ccw(c88.595,62.735) RN901.13@90.37,62.27 ; R907.1@90.404,59.415 cw(c90.4,59.386) 90.37,59.386 RN901.13@90.37,62.27 ; R908.1 cw(c93,59.43) 92.97,59.43 RN901.12 ; RN901.10 98.015,62.7 95.545,62.7 RN901.11 ; RN901.9 RN901.11 ; RN901.13@90.37,62.27 90.37,62.675 cw(c90.43,62.675) RN901.13 RN901.12 ; RN901.12 RN901.11
pads on no net: P901.2 P901.3 P902.1 P902.2 P902.3 P902.4 RN900.8 RN900.9 U900.1 U900.5 U900.8 U902.1 U902.5 U902.8
copper on no net: | length 142.9
  Top Layer w0.254: 132.5,61.9 ccw(c136,61.9) 139.5,61.9 ccw(c135.5,61.9) 131.5,61.9 ccw(c136,61.9) 140.5,61.9 ccw(c135.5,61.9) 130.5,61.9 ccw(c136,61.9) 141.5,61.9 ccw(c135.5,61.9) 129.5,61.9 ccw(c136,61.9) 142.5,61.9 ; 132.5,62 cw(c135.5,62) 138.5,62 cw(c136,62) 133.5,62 cw(c135.5,62) 137.5,62 cw(c136,62) 134.5,62 ; 134.503,62.011 cw(c135.503,62.011) 136.503,62.011 cw(c136.003,62.011) 135.503,62.011

## Other copper
Top Layer:
  text "I got some PPMs in the oven" at 122.4,55.5 h1.52

## Silkscreen, mask and mechanical layers (free items; w line width, h text height)
Top Overlay:
  drawing of 4 lines, arcs and shapes, not listed
  text "PIN 1" at 123.2,73 h1.52
Bottom Overlay:
  lines w0.127: 70.742,53.518 70.742,73.521 70.742,93.523 150.752,93.523 150.752,53.518 70.742,53.518
  lines w0.254: 85.6,66.8 91,61.2 ; 90.2,61.2 91,61.2 ; 91,61.2 91,61.9 91,61.2
  text "CUT: / None->4K / 1->20K / 2->5K / 3->10K / 4->6.66K / 1,4-60K / 1,4,5,8->100K / 4,5,8->70K" at 86.1,74.1 h1.52 r90
  text "1" at 92,64.2 h1 r90
  text "3" at 94.624,64.2 h1 r90
  text "5" at 97.089,64.2 h1 r90
  text "7" at 99.7,64.2 h1 r90
  text "2" at 91.9,56.001 h1 r90
  text "4" at 94.7,56 h1 r90
  text "6" at 97.089,56 h1 r90
  text "8" at 99.489,56 h1 r90
Top Solder:
  region: 142.93,61.8 cw(c135.891,61.8) 142.93,61.8 cw(c142.803,61.8) 142.676,61.8 cw(c142.803,61.8)
  region: 116.8,68.096 cw(c116.8,73.5) 111.396,73.5 cw(c116.8,73.5) 116.8,78.904 cw(c116.8,73.5) 122.204,73.5 cw(c116.8,73.5)
  region: 121.487,59.661 136.287,59.661 136.287,54.761 121.487,54.761
  lines w0.254: 142.803,61.8 ccw(c135.891,61.8) 142.803,61.8
Bottom Solder:
  circle w0.254: c116.8,73.5 r5.404
  region: 142.93,61.8 cw(c135.891,61.8) 142.93,61.8 cw(c142.803,61.8) 142.676,61.8 cw(c142.803,61.8)
  region: 116.8,68.096 cw(c116.8,73.5) 111.396,73.5 cw(c116.8,73.5) 116.8,78.904 cw(c116.8,73.5) 122.204,73.5 cw(c116.8,73.5)
  region: 89.8,55.5 89.8,54.2 101.3,54.2 101.3,55.5
  region: 89.85,63.4 89.85,62.1 101.35,62.1 101.35,63.4
  region: 121.487,59.661 136.287,59.661 136.287,54.761 121.487,54.761
Mechanical 1:
  lines w0.254: 70.7,53.5 150.788,53.5 150.788,93.489 70.711,93.489 70.711,53.5 116.4,53.5